# Altium PCB PCB_厨房烟雾检测_2022-05-04.pcbdoc
Units mm, origin at the board's own origin, x right, y up, seen from the top; angles counter-clockwise.
Board outline 134.75 x 92.33 mm, 2 copper layers (Top Layer, Bottom Layer); 46 components, 57 nets, 212 pads, 318 vias.
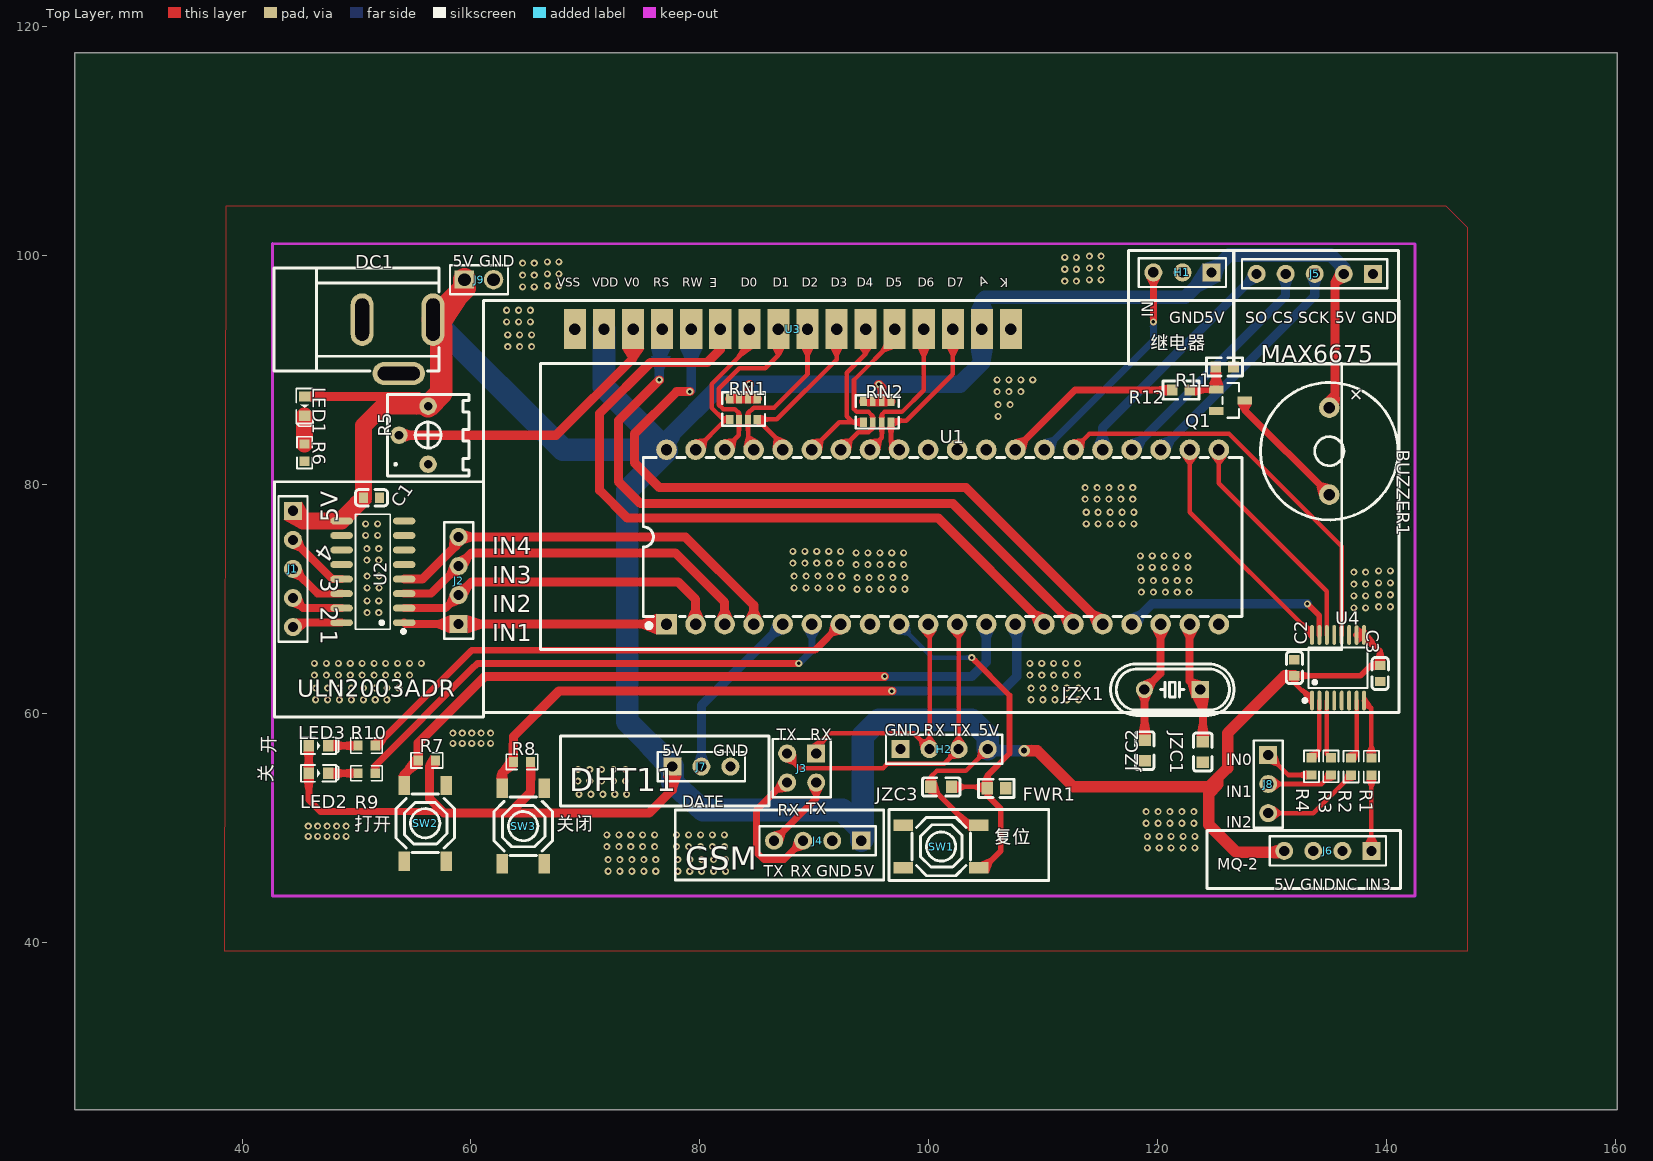
[diagram p0: Top Layer view]
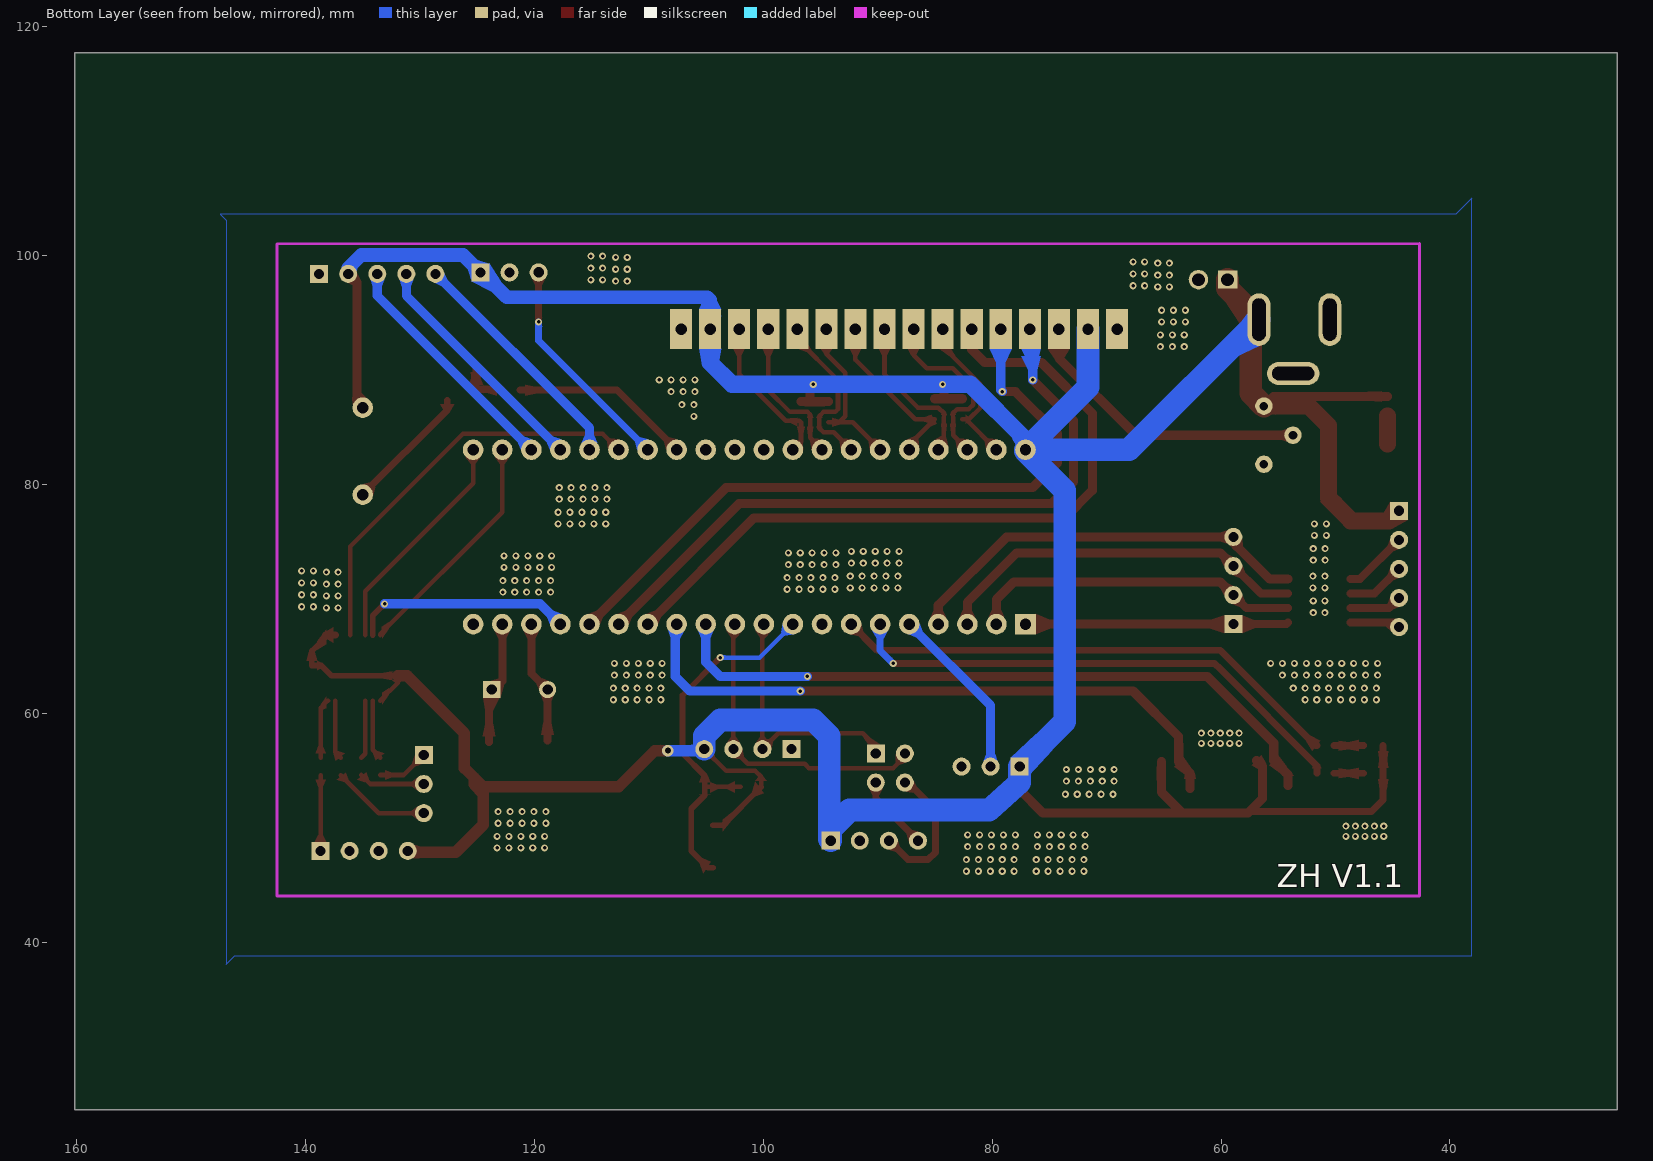
[diagram p1: Bottom Layer view, seen from below]

## Layer stack, top to bottom
Top Layer: signal copper (thickness not stored)
Dielectric: dielectric 0.32, FR-4, Dk 4.8
Bottom Layer: signal copper (thickness not stored)

## Board outline
160.147,25.4 25.4,25.4 25.4,117.729 160.147,117.729

## Components (designator, comment, footprint, x,y, rotation, side; value= is the part's Value field where it differs from the comment)
BUZZER1 "TMB12A05" BUZ-TH_BD12.0-P7.60-D0.6-FD 135.001,82.931 r270 top
C1 "100nF" C0603#1 51.308,78.867 r180 top
C2 "100nF" C0603#1 131.953,64.008 r270 top
C3 "100nF" C0603#1 139.446,63.5 r270 top
DC1 "DC-005-25A" DC-IN-TH_DC005 53.594,92.075 r0 top
FWR1 "10k" R0603#1 105.918,53.467 r180 top
H1 "HDR-F-2.54_1x3" HDR-F-2.54_1X3 122.174,98.552 r180 top
H2 "HDR-F-2.54_1x4" HDR-F-2.54_1X4 101.346,56.896 r0 top
J1 "HDR-M-2.54_1x5" HDR-M-2.54_1X5 44.45,72.644 r270 top
J2 "HDR-M-2.54_1x4" HDR-M-2.54_1X4 58.928,71.628 r90 top
J3 "HDR-M-2.54_2x2" HDR-M-2.54_2X2 88.9,55.245 r270 top
J4 "SIM" HDR-M-2.54_1X4 90.297,48.895 r180 top
J5 "HDR-M-2.54_1x5" HDR-M-2.54_1X5 133.731,98.425 r180 top
J6 "HDR-M-2.54_1x4" HDR-M-2.54_1X4 134.874,48.006 r180 top
J7 "HDR-M-2.54_1x3" HDR-M-2.54_1X3 80.137,55.372 r0 top
J8 "HDR-M-2.54_1x3" HDR-M-2.54_1X3 129.667,53.848 r270 top
J9 "HDR-M-2.54_1x2" HDR-M-2.54_1X2 60.706,97.917 r0 top
JZC1 "22pf" C0603#2 123.952,56.642 r90 top
JZC2 "22pf" C0603#2 118.872,56.769 r90 top
JZC3 "10UF" C0603#2 101.092,53.594 r180 top
JZX1 "11.0592MHz" HC-49US_L11.5-W4.5-P4.88 121.285,62.103 r180 top
LED1 "LED-0603_R" LED0603_RED 45.466,86.868 r270 top
LED2 "LED-0603_R" LED0603_RED 46.686,54.787 r0 top
LED3 "LED-0603_R" LED0603_RED 46.686,57.2 r0 top
Q1 "S8050" SOT23_JX 126.365,87.376 r180 top
R1 "100k" R0603#2 138.684,55.372 r270 top
R2 "100k" R0603#2 136.906,55.372 r270 top
R3 "100k" R0603#2 135.145,55.392 r270 top
R4 "100k" R0603#2 133.452,55.392 r270 top
R5 "10kΩ" RES-ADJ-TH_3362P 54.991,84.328 r90 top
R6 "10k" R0603#2 45.466,82.804 r90 top
R7 "10k" R0603#2 56.155,55.916 r180 top
R8 "10k" R0603#2 64.463,55.789 r180 top
R9 "10k" R0603#2 50.877,54.787 r180 top
R10 "10k" R0603#2 50.877,57.2 r180 top
R11 "10K/1%" 0603_R_JX 125.857,90.297 r180 top
R12 "1K/1%" 0603_R_JX 122.047,88.265 r180 top
RN1 "10kΩ" RES-ARRAY-SMD_0603-8P-L3.2-W1.6-BL 83.82,86.614 r0 top
RN2 "10kΩ" RES-ARRAY-SMD_0603-8P-L3.2-W1.6-BL 95.504,86.36 r0 top
SW1 "TS-1187A-B-B-B" SW-SMD_4P-L5.1-W5.1-P3.70-LS6.5-TL-2 101.092,48.387 r180 top
SW2 "TS-1187A-B-B-B" SW-SMD_4P-L5.1-W5.1-P3.70-LS6.5-TL-2 56.007,50.419 r90 top
SW3 "TS-1187A-B-B-B" SW-SMD_4P-L5.1-W5.1-P3.70-LS6.5-TL-2 64.569,50.165 r90 top
U1 "STC89C516RD+40I-PDIP40" DIP-40_L52.3-W13.9-P2.54-LS15.2-BL 101.219,75.438 r0 top
U2 "ULN2003ADR" SOIC-16_L9.9-W3.9-P1.27-LS6.0-BL 51.435,72.39 r90 top
U3 "LCD-1602" LCD-1602 99.568,75.819 r0 top
U4 "XPT2046" TSSOP-16_L5.0-W4.4-P0.65-LS6.4-BL 135.763,64.008 r0 top

## Footprints (in the part's own frame and the unit in brackets; to place one, negate y for a bottom-side part, rotate by r counter-clockwise, add the part's x,y. Pads: shape width x height; smd on the part's side, far side on the other; paste and mask are expansions set on the pad)
0603_R_JX [mm]
  rect 0.93x0.98 smd: 1(-0.77,-0.003) 2(0.772,-0.003)
  silkscreen extent -1.56,-0.8 1.57,0.8
BUZ-TH_BD12.0-P7.60-D0.6-FD [mm]
  round 1.8 hole 1: 1(-3.8,0) 2(3.8,0)
  silkscreen extent -6,-6 6,6
C0603#1 [mm]
  rect 0.8x0.9 smd: 1(-0.7,0) 2(0.7,0)
  silkscreen extent -1.41,-0.71 1.39,0.72
C0603#2 [mm]
  rect 1x1.1 smd: 1(-0.9,0) 2(0.9,0)
  silkscreen extent -1.65,-0.8 1.65,0.8
DC-IN-TH_DC005 [mm]
  oval 2x4.6 hole 1.2 slot 3.7 at 90 deg: 1(3.1,2.35) 2(-3.1,2.35)
  oval 4.6x2 hole 1.2 slot 3.7 at 0 deg: 3(0.1,-2.35)
  silkscreen extent -10.8,-2.15 3.6,6.85
DIP-40_L52.3-W13.9-P2.54-LS15.2-BL [mm]
  rect 1.8x1.8 hole 1: 1(-24.13,-7.62)
  round 1.8 hole 1: 2(-21.59,-7.62) 3(-19.05,-7.62) 4(-16.51,-7.62) 5(-13.97,-7.62) 6(-11.43,-7.62) 7(-8.89,-7.62) 8(-6.35,-7.62) 9(-3.81,-7.62) 10(-1.27,-7.62) 11(1.27,-7.62) 12(3.81,-7.62) 13(6.35,-7.62) 14(8.89,-7.62) 15(11.43,-7.62) 16(13.97,-7.62) 17(16.51,-7.62) 18(19.05,-7.62) 19(21.59,-7.62) 20(24.13,-7.62) 21(24.13,7.62) 22(21.59,7.62) 23(19.05,7.62) 24(16.51,7.62) 25(13.97,7.62) 26(11.43,7.62) 27(8.89,7.62) 28(6.35,7.62) 29(3.81,7.62) 30(1.27,7.62) 31(-1.27,7.62) 32(-3.81,7.62) 33(-6.35,7.62) 34(-8.89,7.62) 35(-11.43,7.62) 36(-13.97,7.62) 37(-16.51,7.62) 38(-19.05,7.62) 39(-21.59,7.62) 40(-24.13,7.62)
  silkscreen extent -26.16,-7.95 26.16,6.93
HC-49US_L11.5-W4.5-P4.88 [mm]
  rect 1.5x1.5 hole 0.9: 1(-2.44,0)
  round 1.5 hole 0.9: 2(2.44,0)
  silkscreen extent -5.39,-2.25 5.39,2.25
HDR-F-2.54_1X3 [mil]
  rect 62x62 hole 35: 1(-100,0)
  round 62 hole 35: 2(0,0)
  round 62 hole 36: 3(100,0)
  silkscreen extent -150,-49 150,50
HDR-F-2.54_1X4 [mil]
  rect 62x62 hole 35: 1(-150,0)
  round 62 hole 35: 2(-50,0) 3(50,0) 4(150,0)
  silkscreen extent -200,-50 200,50
HDR-M-2.54_1X2 [mm]
  rect 1.7x1.575 hole 1.1: 1(-1.27,0)
  round 1.7 hole 1.1: 2(1.27,0)
  silkscreen extent -2.54,-1.27 2.54,1.27
HDR-M-2.54_1X3 [mil]
  rect 62x62 hole 35: 1(-100,0)
  round 62 hole 35: 2(0,0) 3(100,0)
  silkscreen extent -150,-50 150,50
HDR-M-2.54_1X4 [mil]
  rect 62x62 hole 35: 1(-150,0)
  round 62 hole 35: 2(-50,0) 3(50,0) 4(150,0)
  silkscreen extent -200,-50 200,50
HDR-M-2.54_1X5 [mil]
  rect 62x62 hole 35: 1(-200,0)
  round 62 hole 35: 2(-100,0) 3(0,0) 4(100,0) 5(200,0)
  silkscreen extent -250,-50 250,50
HDR-M-2.54_2X2 [mil]
  rect 62x62 hole 35: 1(-50,50)
  round 62 hole 35: 2(50,50) 3(-50,-50) 4(50,-50)
  silkscreen extent -100,-100 100,100
LCD-1602 [mil]
  rect 76x136.8 hole 39.4: 1(-1200,700) 2(-1100,700) 3(-1000,700) 4(-900,700) 5(-800,700) 6(-700,700) 7(-600,700) 8(-500,700) 9(-400,700) 10(-300,700) 11(-200,700) 12(-100,700) 13(0,700) 14(100,700) 15(200,700) 16(300,700)
  silkscreen extent -1515,-619 1635,798
LED0603_RED [mm]
  rect 0.9x1 smd: 1(-0.85,0) 2(0.85,0)
  silkscreen extent -1.54,-0.73 1.75,0.73
R0603#1 [mm]
  rect 1x1.1 smd: 1(-0.8,0) 2(0.8,0)
  silkscreen extent -1.55,-0.8 1.55,0.81
R0603#2 [mm]
  rect 0.806x0.864 smd: 1(-0.753,0) 2(0.753,0)
  silkscreen extent -1.39,-0.66 1.39,0.66
RES-ADJ-TH_3362P [mil]
  round 60 hole 30: 1(-100,-50) 2(0,50) 3(100,-50)
  silkscreen extent -140,-190 140,90
RES-ARRAY-SMD_0603-8P-L3.2-W1.6-BL [mm]
  rect 0.65x0.8 smd: 1(-1.2,-0.9) 4(1.2,-0.9) 5(1.2,0.9) 8(-1.2,0.9)
  rect 0.5x0.8 smd: 2(-0.4,-0.9) 3(0.4,-0.9) 6(0.4,0.9) 7(-0.4,0.9)
  silkscreen extent -1.87,-1.45 1.87,1.47
SOIC-16_L9.9-W3.9-P1.27-LS6.0-BL [mm]
  oval 0.602x1.971 smd: 1(-4.445,-2.736) 2(-3.175,-2.736) 3(-1.905,-2.736) 4(-0.635,-2.736) 5(0.635,-2.736) 6(1.905,-2.736) 7(3.175,-2.736) 8(4.445,-2.736) 9(4.445,2.736) 10(3.175,2.736) 11(1.905,2.736) 12(0.635,2.736) 13(-0.635,2.736) 14(-1.905,2.736) 15(-3.175,2.736) 16(-4.445,2.736)
  silkscreen extent -5.36,-2.82 5.03,1.52
SOT23_JX [mm]
  rect 1.25x0.7 smd: 1(1.25,-0.95) 2(1.25,0.95) 3(-1.25,0)
  silkscreen extent -0.76,-1.52 0.69,1.52
SW-SMD_4P-L5.1-W5.1-P3.70-LS6.5-TL-2 [mm]
  rect 1.7x1 smd: 1(-3.3,1.849) 2(3.3,1.85) 3(-3.3,-1.85) 4(3.3,-1.85)
  silkscreen extent -2.55,-2.55 2.55,2.55
TSSOP-16_L5.0-W4.4-P0.65-LS6.4-BL [mm]
  oval 0.343x1.731 smd: 1(-2.275,-2.866) 2(-1.625,-2.866) 3(-0.975,-2.866) 4(-0.325,-2.866) 5(0.325,-2.866) 6(0.975,-2.866) 7(1.625,-2.866) 8(2.275,-2.866) 9(2.275,2.866) 10(1.625,2.866) 11(0.975,2.866) 12(0.325,2.866) 13(-0.325,2.866) 14(-0.975,2.866) 15(-1.625,2.866) 16(-2.275,2.866)
  silkscreen extent -3.05,-3.02 2.58,1.77

## Via types
v1: diameter 0.62, hole 0.305, Top Layer to Bottom Layer, tented both sides, 317 vias
v2: diameter 1, hole 0.5, Top Layer to Bottom Layer, tented both sides, 1 vias

## Nets (pads, with @x,y where several pads share a name; then routed paths per layer and width w, separated by ;. In a path a pad name is that pad's centre, name@x,y a point inside that pad or via, vN(x,y) a via of type N, cw(c..) or ccw(c..) an arc to the next point about the centre after c; other vN are vias at no path point)
1IN: J2.1 U1.1 U2.1 | length 23
  Top Layer w0.7: U2.1 54.298,67.818 J2.1
  Top Layer w0.8: J2.1 U1.1
2IN: J2.2 U1.2 U2.2 | length 29.2
  Top Layer w0.7: U2.2 57.785,69.215 J2.2
  Top Layer w0.8: J2.2 60.071,71.501 78.105,71.501 79.629,69.977 U1.2
3IN: J2.3 U1.3 U2.3 | length 33.2
  Top Layer w0.7: U2.3 56.515,70.485 J2.3
  Top Layer w0.8: J2.3 60.071,74.041 77.851,74.041 82.169,69.723 U1.3
4IN: J2.4 U1.4 U2.4 | length 36.5
  Top Layer w0.8: U2.4 55.753,71.755 58.928,74.93 J2.4 78.74,75.438 84.709,69.469 U1.4
+5.0V: BUZZER1.1 C1.2 C2.2 C3.1 DC1.1 H1.1 H2.4 J1.1 J4.1 J5.2 J6.4 J7.1 J9.1 JZC3.2 LED1.1 LED2.1 LED3.1 R5.3 R7.1 R8.1 RN1.5 RN1.6 RN1.7 RN1.8 RN2.5 RN2.6 RN2.7 RN2.8 SW1.3 U1.40 U2.9 U3.2 U3.15 U4.1 U4.9 U4.10 | length 370.4
  Top Layer w0.4: JZC3.2 100.193,54.473 100.711,54.991 103.251,54.991 H2.4 ; C2.2 131.953,62.677 U4.1
  Top Layer w0.5: JZC3.2 103.548,50.236 SW1.3 ; C2.2 137.739,63.307 138.631,64.201 C3.1 139.446,65.466 U4.9
  Top Layer w0.6: LED3.1 LED2.1 45.837,52.461 46.863,51.435 57.531,51.435 57.658,51.308 ; U4.10 138.239,66.873
  Top Layer w0.8: LED1.1 55.41,87.719 R5.3 ; R7.1 56.388,55.395 56.388,52.578 57.658,51.308 63.373,51.308 ; R8.1 65.217,53.152 63.373,51.308 ; J7.1 77.597,53.34 75.565,51.308 63.373,51.308 ; RN1.8 RN1.5 ; RN1.6 84.221,88.664 v1(84.328,88.773) ; RN2.8 RN2.5 ; v1(95.631,88.773) 95.905,88.501 RN2.6 ; BUZZER1.1 135.509,87.234 135.509,97.663 J5.2
  Top Layer w1: v2(108.331,56.769) 109.474,56.769 112.649,53.594 124.46,53.594 126.111,55.245 126.111,58.293 131.125,63.307 C2.2 ; 125.27,54.404 125.27,53.816 124.46,53.006 124.46,50.292 126.873,47.879 130.937,47.879 J6.4
  Top Layer w1.5: J1.1 45.339,76.835 U2.9 48.699,76.959 C1.2 50.607,85.151 52.324,86.868 R5.3
  Top Layer w2: R5.3 57.404,88.011 57.404,93.715 DC1.1 ; DC1.1 59.436,97.168 J9.1
  Bottom Layer w1: H2.4 105.283,56.769 v2(108.331,56.769)
  Bottom Layer w1.2: U3.15 104.648,96.139 104.902,96.393 122.428,96.393 124.587,98.552 H1.1 126.238,100.076 135.128,100.076 136.271,98.933 J5.2
  Bottom Layer w1.5: U1.40 77.089,83.947 81.915,88.773 v1(84.328,88.773) v1(95.631,88.773) 102.743,88.773 104.648,90.678 U3.15
  Bottom Layer w2: DC1.1 68.062,83.058 U1.40 ; U3.2 71.628,88.519 U1.40 ; H2.4 105.156,58.039 103.759,59.436 95.631,59.436 94.234,58.039 94.234,49.022 J4.1 94.107,49.911 92.456,51.562 80.264,51.562 77.597,53.975 J7.1 73.66,59.309 73.66,79.502 77.089,82.931 U1.40
AIN0: J8.1 R4.2 | length 4.5
  Top Layer w0.4: J8.1 131.417,54.638 R4.2
AIN1: J8.2 R3.2 | length 5.8
  Top Layer w0.4: J8.2 134.356,53.848 R3.2
AIN2: J8.3 R2.2 | length 8.6
  Top Layer w0.4: J8.3 133.596,51.308 R2.2
AIN3: J6.1 R1.2 | length 6.6
  Top Layer w0.4: J6.1 R1.2
BUZZER_CTR: R12.2 U1.28 | length 15.9
  Top Layer w0.6: U1.28 112.779,88.268 R12.2
CS: J5.4 U1.24 | length 20.9
  Bottom Layer w0.8: U1.24 131.191,96.52 J5.4
D0: RN1.1 U1.39 U3.7 | length 14.3
  Top Layer w0.4: U1.39 82.286,85.715 RN1.1 82.052,85.715 81.026,86.741 81.026,88.773 84.328,92.075 U3.7
D1: RN1.2 U1.38 U3.8 | length 15.9
  Top Layer w0.4: U1.38 83.419,84.31 RN1.2 83.439,86.233 83.058,86.614 82.042,86.614 81.661,86.995 81.661,88.392 83.439,90.17 85.725,90.17 86.868,91.313 U3.8
D2: RN1.3 U1.37 U3.9 | length 13.9
  Top Layer w0.4: U1.37 84.221,83.548 84.221,85.715 84.201,86.233 84.709,86.741 86.487,86.741 89.408,89.662 U3.9
D3: RN1.4 U1.36 U3.10 | length 15.3
  Top Layer w0.4: U1.36 87.249,83.485 RN1.4 86.731,85.715 91.948,90.932 U3.10
D4: RN2.1 U1.35 U3.11 | length 15.5
  Top Layer w0.4: U1.35 92.192,85.461 RN2.1 93.365,85.461 92.837,85.989 92.837,89.789 94.488,91.44 U3.11
D5: RN2.2 U1.34 U3.12 | length 15
  Top Layer w0.4: U1.34 93.853,84.582 94.742,84.582 95.103,84.945 RN2.2 95.103,85.997 94.742,86.36 93.726,86.36 93.472,86.614 93.472,89.154 97.028,92.71 U3.12
D6: RN2.3 U1.33 U3.13 | length 13.4
  Top Layer w0.4: U1.33 95.905,84.092 95.905,85.461 95.905,86.126 96.139,86.36 97.663,86.36 99.568,88.265 U3.13
D7: RN2.4 U1.32 U3.14 | length 13.8
  Top Layer w0.4: U1.32 96.703,83.764 RN2.4 96.843,85.598 98.044,85.598 102.108,89.662 U3.14
GND: C1.1 C2.1 C3.2 DC1.2 DC1.3 FWR1.1 H1.2 H2.1 J4.2 J5.1 J6.3 J7.3 J9.2 JZC1.1 JZC2.1 Q1.2 R5.1 R6.1 R11.1 SW2.4 SW3.4 U1.20 U2.8 U3.1 U3.16 U4.4 U4.5 U4.6
  other v1: 71.984,46.228 73.025,46.228 74.066,46.228 75.108,46.228 76.149,46.228 78.08,46.228 79.121,46.228 80.162,46.228 81.204,46.228 82.245,46.228 71.984,47.244 73.025,47.244 74.066,47.244 75.108,47.244 76.149,47.244 78.08,47.244 79.121,47.244 80.162,47.244 81.204,47.244 82.245,47.244 119.101,48.26 120.142,48.26 121.183,48.26 122.225,48.26 123.266,48.26 71.882,48.387 72.923,48.387 73.965,48.387 75.006,48.387 76.048,48.387 77.978,48.387 79.019,48.387 80.061,48.387 81.102,48.387 82.144,48.387 45.783,49.276 46.609,49.276 47.434,49.276 48.26,49.276 49.085,49.276 119.101,49.276 120.142,49.276 121.183,49.276 122.225,49.276 123.266,49.276 71.882,49.403 72.923,49.403 73.965,49.403 75.006,49.403 76.048,49.403 77.978,49.403 79.019,49.403 80.061,49.403 81.102,49.403 82.144,49.403 45.783,50.165 46.609,50.165 47.434,50.165 48.26,50.165 49.085,50.165 118.999,50.419 120.04,50.419 121.082,50.419 122.123,50.419 123.165,50.419 118.999,51.435 120.04,51.435 121.082,51.435 122.123,51.435 123.165,51.435 69.444,52.959 70.485,52.959 71.526,52.959 72.568,52.959 73.609,52.959 69.342,54.102 70.383,54.102 71.425,54.102 72.466,54.102 73.508,54.102 69.342,55.118 70.383,55.118 71.425,55.118 72.466,55.118 73.508,55.118 58.42,57.404 59.245,57.404 60.071,57.404 60.896,57.404 61.722,57.404 58.42,58.293 59.245,58.293 60.071,58.293 60.896,58.293 61.722,58.293 46.431,61.214 47.473,61.214 48.514,61.214 49.555,61.214 50.597,61.214 51.638,61.214 52.654,61.214 108.941,61.214 109.982,61.214 111.023,61.214 112.065,61.214 113.106,61.214 46.431,62.23 47.473,62.23 48.514,62.23 49.555,62.23 50.597,62.23 51.638,62.23 52.654,62.23 53.696,62.23 108.941,62.23 109.982,62.23 111.023,62.23 112.065,62.23 113.106,62.23 46.33,63.373 47.371,63.373 48.412,63.373 49.454,63.373 50.495,63.373 51.537,63.373 52.553,63.373 53.594,63.373 54.635,63.373 108.839,63.373 109.88,63.373 110.922,63.373 111.963,63.373 113.005,63.373 46.33,64.389 47.371,64.389 48.412,64.389 49.454,64.389 50.495,64.389 51.537,64.389 52.553,64.389 53.594,64.389 54.635,64.389 55.677,64.389 108.839,64.389 109.88,64.389 110.922,64.389 111.963,64.389 113.005,64.389 50.927,68.834 51.943,68.834 137.16,69.24 138.176,69.24 139.319,69.342 140.335,69.342 50.927,69.85 51.943,69.85 137.16,70.282 138.176,70.282 139.319,70.383 140.335,70.383 118.593,70.612 119.634,70.612 120.675,70.612 121.717,70.612 122.758,70.612 93.751,70.866 94.793,70.866 95.834,70.866 96.876,70.866 97.917,70.866 50.927,70.993 51.968,70.993 88.24,70.993 89.281,70.993 90.322,70.993 91.364,70.993 92.405,70.993 137.16,71.323 138.176,71.323 139.319,71.425 140.335,71.425 118.593,71.628 119.634,71.628 120.675,71.628 121.717,71.628 122.758,71.628 93.751,71.882 94.793,71.882 95.834,71.882 96.876,71.882 97.917,71.882 50.927,72.009 51.968,72.009 88.24,72.009 89.281,72.009 90.322,72.009 91.364,72.009 92.405,72.009 137.16,72.365 138.176,72.365 139.319,72.466 140.335,72.466 118.491,72.771 119.532,72.771 120.574,72.771 121.615,72.771 122.657,72.771 93.65,73.025 94.691,73.025 95.733,73.025 96.774,73.025 97.815,73.025 88.138,73.152 89.179,73.152 90.221,73.152 91.262,73.152 92.304,73.152 50.902,73.406 51.943,73.406 118.491,73.787 119.532,73.787 120.574,73.787 121.615,73.787 122.657,73.787 93.65,74.041 94.691,74.041 95.733,74.041 96.774,74.041 97.815,74.041 88.138,74.168 89.179,74.168 90.221,74.168 91.262,74.168 92.304,74.168 50.902,74.422 51.943,74.422 50.8,75.565 51.841,75.565 50.8,76.581 51.841,76.581 113.767,76.581 114.808,76.581 115.849,76.581 116.891,76.581 117.932,76.581 113.767,77.597 114.808,77.597 115.849,77.597 116.891,77.597 117.932,77.597 113.665,78.74 114.706,78.74 115.748,78.74 116.789,78.74 117.831,78.74 113.665,79.756 114.706,79.756 115.748,79.756 116.789,79.756 117.831,79.756 106.07,85.979 106.07,86.995 107.112,86.995 105.969,88.138 107.01,88.138 108.052,88.138 105.969,89.154 107.01,89.154 108.052,89.154 109.093,89.154 63.221,92.075 64.262,92.075 65.303,92.075 63.221,93.091 64.262,93.091 65.303,93.091 63.119,94.234 64.16,94.234 65.202,94.234 63.119,95.25 64.16,95.25 65.202,95.25 64.516,97.282 65.532,97.282 66.675,97.384 67.691,97.384 111.887,97.79 112.903,97.79 114.046,97.892 115.062,97.892 64.516,98.323 65.532,98.323 66.675,98.425 67.691,98.425 111.887,98.831 112.903,98.831 114.046,98.933 115.062,98.933 64.516,99.365 65.532,99.365 66.675,99.466 67.691,99.466 111.887,99.873 112.903,99.873 114.046,99.974 115.062,99.974
KEY1: R7.2 SW2.2 U1.12 | length 60.1
  Top Layer w0.8: SW2.2@54.155,53.718 54.155,54.671 R7.2 55.402,57.434 61.214,63.246 v1(96.139,63.246)
  Bottom Layer w0.8: v1(96.139,63.246) 103.759,63.246 105.029,64.516 U1.12
KEY2: R8.2 SW3.2 U1.13 | length 55.7
  Top Layer w0.8: SW3.2 62.718,54.798 R8.2 63.711,57.996 67.691,61.976 v1(96.774,61.976)
  Bottom Layer w0.8: v1(96.774,61.976) 106.426,61.976 107.696,63.246 107.696,67.691 U1.13
LED1: R9.1 U1.6 | length 45.3
  Top Layer w0.6: R9.1 51.631,55.441 60.071,63.881 60.579,64.389 v1(88.646,64.389)
  Bottom Layer w0.6: v1(88.646,64.389) 89.789,65.532 U1.6
LED1_2: LED1.2 R6.2 | length 2.5
  Top Layer w1.5: R6.2 LED1.2
LED2: R10.1 U1.7 | length 45.1
  Top Layer w0.6: R10.1 51.74,57.201 60.071,65.532 90.043,65.532 U1.7
LED3_2: LED3.2 R10.2 | length 2.6
  Top Layer w0.6: LED3.2 R10.2
MCU_RX: H2.2 J3.1 U1.10 | length 22.6
  Top Layer w0.4: J3.1 90.17,57.15 91.313,58.293 98.679,58.293 H2.2 100.076,67.691 U1.10
MCU_TX: H2.3 J3.3 U1.11 | length 27.3
  Top Layer w0.4: J3.3 87.63,56.261 88.646,55.245 96.012,55.245 96.393,55.626 101.346,55.626 H2.3 102.616,67.691 U1.11
P20/SDA: U1.21 U4.14 | length 20.1
  Top Layer w0.4: U1.21 125.349,80.137 134.788,70.698 U4.14
P21/SCL: U1.22 U4.16 | length 20.6
  Top Layer w0.4: U1.22 122.809,77.597 133.487,66.919 U4.16
P25/ADC: U1.26 U4.12 | length 35.8
  Top Layer w0.4: U1.26 114.046,84.455 126.238,84.455 136.088,74.605 U4.12
P34/LCDEN: U1.14 U3.6 | length 65.1
  Top Layer w0.8: U3.6 81.788,91.821 80.645,90.678 75.692,90.678 71.247,86.233 71.247,79.502 73.66,77.089 100.838,77.089 U1.14
P35/RS: U1.15 U3.4 | length 59.8
  Top Layer w0.8: v1(76.454,89.154) 72.898,85.598 72.898,80.264 74.803,78.359 102.108,78.359 U1.15
  Bottom Layer w0.8: v1(76.454,89.154) 76.454,93.345 U3.4
P36/WR: U1.16 U3.5 | length 61.1
  Top Layer w0.8: v1(79.121,88.138) 77.978,88.138 74.295,84.455 74.295,81.915 76.454,79.756 103.251,79.756 U1.16
  Bottom Layer w0.8: v1(79.121,88.138) 79.248,88.265 U3.5
P37/RD: U1.17 U4.15 | length 19.3
  Top Layer w0.5: v1(133.096,69.596) 134.137,68.555 U4.15
  Bottom Layer w0.8: U1.17 119.507,69.596 v1(133.096,69.596)
Q1_3: BUZZER1.2 Q1.3 | length 11.3
  Top Layer w0.6: Q1.3 127.615,86.517 BUZZER1.2
R9_2: LED2.2 R9.2 | length 2.6
  Top Layer w0.6: LED2.2 R9.2
R11_2: Q1.1 R11.2 R12.1 | length 4.3
  Top Layer w0.6: R12.1 122.875,88.326 Q1.1 125.115,90.272 R11.2
RELAY: H1.3 U1.27 | length 19.4
  Top Layer w0.6: v1(119.634,94.234) H1.3
  Bottom Layer w0.6: U1.27 119.634,92.583 v1(119.634,94.234)
RST: FWR1.2 JZC3.1 SW1.1 U1.9 | length 32.8
  Top Layer w0.4: JZC3.1 104.991,53.594 FWR1.2
  Top Layer w0.5: v1(103.759,64.897) 107.061,61.595 107.061,56.515 105.118,54.572 FWR1.2 105.118,52.87 106.299,51.689 106.299,48.006 104.831,46.538 SW1.1
  Bottom Layer w0.4: U1.9 100.33,64.897 v1(103.759,64.897)
S$164: 
SCK: J5.3 U1.23 | length 20.9
  Bottom Layer w0.8: U1.23 133.731,96.52 J5.3
SO: J5.5 U1.25 | length 20.9
  Bottom Layer w0.8: U1.25 115.189,84.963 J5.5
T-RX: J3.4 J4.3 | length 12.4
  Top Layer w0.6: J3.4 87.376,53.975 84.963,51.562 84.963,47.879 85.598,47.244 87.376,47.244 J4.3
T-TX: J3.2 J4.4 | length 6.6
  Top Layer w0.6: J4.4 90.17,52.578 J3.2
U2_13: J1.2 U2.13 | length 5.7
  Top Layer w0.7: J1.2 47.879,71.755 U2.13
U2_14: J1.3 U2.14 | length 5.1
  Top Layer w0.7: J1.3 46.609,70.485 U2.14
U2_15: J1.4 U2.15 | length 4.6
  Top Layer w0.7: J1.4 45.339,69.215 U2.15
U2_16: J1.5 U2.16 | length 4.4
  Top Layer w0.7: J1.5 44.831,67.945 U2.16
U4_2: R4.1 U4.2 | length 5.3
  Top Layer w0.4: R4.1@133.452,56.147 134.137,56.832 U4.2
U4_3: R3.1 U4.3 | length 5.1
  Top Layer w0.4: U4.3 134.788,56.505 R3.1@135.146,56.147
U4_7: R2.1 U4.7 | length 5.2
  Top Layer w0.4: R2.1 137.389,56.609 U4.7
U4_8: R1.1 U4.8 | length 5.3
  Top Layer w0.4: U4.8 138.684,60.495 R1.1
VO: R5.2 U3.3 | length 25.8
  Top Layer w0.8: R5.2 67.437,84.328 74.168,91.059 U3.3
WEN_DATE: J7.2 U1.5 | length 15.4
  Bottom Layer w0.8: J7.2 80.137,60.706 U1.5
XTAL1: JZC1.2 JZX1.1 U1.19 | length 10.8
  Top Layer w0.7: U1.19 122.809,62.865 123.571,62.103 JZX1.1 123.952,61.877 JZC1.2
XTAL2: JZC2.2 JZX1.2 U1.18 | length 10.8
  Top Layer w0.7: JZX1.2 118.872,62.075 JZC2.2 ; JZX1.2 120.269,63.527 U1.18
pads on no net: J6.2 SW1.2 SW1.4 SW2.1 SW2.3 SW3.1 SW3.3 U1.8 U1.29 U1.30 U1.31 U2.5 U2.6 U2.7 U2.10 U2.11 U2.12 U4.11 U4.13

## Polygon pours and split planes (outlines as drawn)
GND on Bottom Layer (solid): 38.1,105.029 39.497,103.632 147.447,103.632 146.939,103.124 146.939,38.1 146.177,38.862 38.1,38.862
GND on Top Layer (solid): 38.608,104.394 145.161,104.394 147.066,102.489 147.066,39.243 38.481,39.243

## Other copper
Top Layer:
  region net RELAY: 119.401,94.439 119.867,94.439 119.934,94.656 119.334,94.656
  region net RELAY: 120.225,98.031 119.043,98.031 119.334,97.48 119.934,97.48
  region net BUZZER_CTR: 107.513,83.956 108.467,83.002 108.648,83.712 108.223,84.137
  region net BUZZER_CTR: 120.81,87.778 120.81,88.758 119.91,88.568 119.91,87.968
  region net T-TX: 90.761,53.454 89.579,53.454 89.87,52.903 90.47,52.903
  region net T-TX: 86.438,49.681 87.273,48.846 87.457,49.441 87.033,49.865
  region net T-RX: 88.241,48.944 89.076,48.109 88.481,47.925 88.057,48.349
  region net T-RX: 87.547,53.192 86.864,54.155 86.58,53.603 86.932,53.107
  region net T-RX: 87.547,53.192 86.864,54.155 86.58,53.603 86.932,53.107
  region net +5.0V: 100.692,54.045 99.943,53.044 100.67,52.763 100.972,53.168
  region net +5.0V: 103.543,49.738 103.543,50.736 102.793,51.347 102.793,50.64
  region net RST: 104.601,47.038 105.242,46.038 105.567,46.921 105.291,47.351
  region net RST: 105.618,52.917 104.618,52.917 104.868,52.87 105.368,52.87
  region net +5.0V: 46.286,54.287 45.386,54.287 45.536,53.387 46.136,53.387
  region net LED2: 91.431,67.874 92.385,66.92 91.675,66.739 91.25,67.164
  region net LED2: 51.35,57.632 52.034,56.768 52.541,57.577 52.166,58.051
  region net LED1: 52.034,55.219 51.228,55.219 51.331,55.441 51.931,55.441
  region net LED3_2: 47.986,57.7 47.986,56.7 48.886,56.9 48.886,57.5
  region net LED3_2: 49.721,56.768 49.721,57.632 48.821,57.5 48.821,56.9
  region net R9_2: 47.986,55.287 47.986,54.287 48.886,54.487 48.886,55.087
  region net R9_2: 49.721,54.355 49.721,55.219 48.821,55.087 48.821,54.487
  region net +5.0V: 46.286,56.7 45.386,56.7 45.536,55.8 46.136,55.8
  region net +5.0V: 45.386,55.287 46.286,55.287 46.136,56.187 45.536,56.187
  region net KEY1: 54.998,56.348 55.805,56.348 55.801,57.433 55.001,57.433
  region net KEY2: 63.307,56.221 64.113,56.221 64.11,57.421 63.31,57.421
  region net RST: 104.618,54.017 105.618,54.017 105.368,54.572 104.868,54.572
  region net RST: 104.068,64.916 103.74,64.588 103.881,64.422 104.234,64.775
  region net +5.0V: 78.384,54.585 76.81,54.585 77.197,53.385 77.997,53.385
  region net +5.0V: 64.813,55.357 65.62,55.357 65.616,54.157 64.816,54.157
  region net +5.0V: 57.311,55.484 56.505,56.348 56.115,55.688 56.671,55.113
  region net KEY2: 64.113,55.357 63.307,56.221 62.588,55.232 63.134,54.647
  region net KEY2: 62.219,54.315 63.219,54.315 63.119,54.798 62.319,54.798
  region net KEY1: 55.805,55.484 54.998,56.348 54.279,55.359 54.825,54.774
  region net KEY1: 53.657,54.569 54.657,54.569 54.557,54.671 53.757,54.671
  region net +5.0V: 135.485,98.474 136.32,97.639 135.796,97.384 135.23,97.95
  region net +5.0V: 135.862,86.993 134.634,87.553 135.109,88.028 135.909,87.664
  region net Q1_3: 128.24,87.026 126.99,87.026 127.315,86.517 127.915,86.517
  region net Q1_3: 134.103,79.075 135.057,80.029 134.347,80.21 133.922,79.785
  region net R11_2: 123.282,88.758 123.282,87.778 124.182,88.026 124.182,88.626
  region net R11_2: 124.49,87.976 124.49,88.676 123.59,88.626 123.59,88.026
  region net R11_2: 125.55,89.809 124.62,89.809 124.815,88.909 125.415,88.909
  region net R11_2: 124.49,88.676 125.74,88.676 125.415,89.576 124.815,89.576
  region net +5.0V: 48.015,77.136 49.384,76.534 51.336,78.534 49.646,78.965
  region net +5.0V: 55.757,86.296 55.757,87.439 55.224,87.618 55.224,86.118
  region net AIN3: 139.116,54.216 138.252,54.216 138.484,53.616 138.884,53.616
  region net AIN3: 138.184,48.793 139.184,48.793 138.884,49.393 138.484,49.393
  region net +5.0V: 104.37,56.945 105.205,56.11 104.539,55.997 104.257,56.279
  region net +5.0V: 99.693,54.145 100.691,54.145 100.392,54.472 99.992,54.472
  region net RST: 104.617,53.094 104.617,54.018 104.017,53.794 104.017,53.394
  region net RST: 102.491,54.094 102.491,53.094 103.091,53.394 103.091,53.794
  region net D7: 97.029,85.86 97.029,85.098 97.629,85.398 97.629,85.798
  region net D5: 94.854,85.86 95.354,85.86 95.304,85.998 94.904,85.998
  region net D3: 85.344,86.114 85.344,85.313 85.944,85.514 85.944,85.914
  region net D2: 83.97,86.114 84.47,86.114 84.401,86.233 84.001,86.226
  region net D1: 83.17,86.114 83.67,86.114 83.639,86.225 83.239,86.233
  region net D0: 82.295,85.314 82.295,86.114 82.053,85.914 82.053,85.514
  region net P34/LCDEN: 109.211,67.762 110.165,68.716 109.525,68.967 108.96,68.402
  region net VO: 54.225,83.757 54.225,84.9 54.758,84.728 54.758,83.928
  region net XTAL1: 124.475,61.354 123.077,61.354 123.602,60.304 124.302,60.304
  region net XTAL1: 123.401,58.042 124.503,58.042 124.302,59.092 123.602,59.092
  region net D7: 102.608,91.862 101.608,91.862 101.908,91.262 102.308,91.262
  region net D7: 97.029,85.86 97.029,85.098 97.629,85.398 97.629,85.798
  region net D5: 96.986,91.862 96.063,92.245 95.758,91.722 96.157,91.556
  region net D5: 94.854,85.86 95.354,85.86 95.304,85.998 94.904,85.998
  region net D4: 94.988,91.862 93.988,91.862 94.288,91.44 94.688,91.44
  region net D3: 92.448,91.862 91.448,91.862 91.748,91.262 92.148,91.262
  region net D3: 85.344,86.114 85.344,85.313 85.944,85.514 85.944,85.914
  region net D2: 89.908,91.862 88.908,91.862 89.208,91.262 89.608,91.262
  region net D2: 83.97,86.114 84.47,86.114 84.401,86.233 84.001,86.226
  region net D1: 87.368,91.862 86.368,91.862 86.668,91.313 87.068,91.313
  region net D1: 83.17,86.114 83.67,86.114 83.639,86.225 83.239,86.233
  region net D0: 84.615,91.862 83.615,91.862 83.232,91.262 83.797,91.262
  region net D0: 82.295,85.314 82.295,86.114 82.053,85.914 82.053,85.514
  region net P34/LCDEN: 82.753,91.862 80.823,91.862 81.388,91.821 82.188,91.821
  region net P34/LCDEN: 109.211,67.762 110.165,68.716 109.525,68.967 108.96,68.402
  region net VO: 75.133,91.862 73.203,91.862 73.768,91.059 74.568,91.059
  region net VO: 54.225,83.757 54.225,84.9 54.758,84.728 54.758,83.928
  region net +5.0V: 45.237,78.511 43.663,76.937 44.809,76.305 45.869,77.365
  region net U2_13: 44.401,74.398 45.236,75.233 45.456,74.673 44.961,74.178
  region net U2_14: 44.401,71.858 45.236,72.693 45.456,72.133 44.961,71.638
  region net U2_15: 44.401,69.318 45.236,70.153 45.456,69.593 44.961,69.098
  region net U2_16: 45.147,67.197 44.727,68.301 45.319,68.295 45.585,67.595
  region net +5.0V: 94.629,87.66 94.629,86.86 95.829,86.86 95.829,87.66
  region net +5.0V: 96.379,86.86 96.379,87.66 95.179,87.66 95.179,86.86
  region net +5.0V: 82.945,87.914 82.945,87.114 84.145,87.114 84.145,87.914
  region net +5.0V: 84.695,87.114 84.695,87.914 83.495,87.914 83.495,87.114
  region net +5.0V: 45.966,88.168 45.966,87.268 47.166,87.318 47.166,88.118
  region net +5.0V: 55.5,86.82 56.309,87.629 55.81,87.884 55.245,87.319
  region net P35/RS: 111.751,67.762 112.705,68.716 112.065,68.967 111.5,68.402
  region net 4IN: 59.238,74.714 58.171,75.221 58.084,74.652 58.851,74.288
  region net 3IN: 58.142,72.947 58.977,72.112 58.417,71.892 57.922,72.387
  region net 2IN: 58.142,70.407 58.977,69.572 58.417,69.352 57.922,69.847
  region net 1IN: 58.141,67.031 58.141,68.605 57.091,68.168 57.091,67.468
  region net 1IN: 59.715,68.605 59.715,67.031 60.915,67.418 60.915,68.218
  region net 1IN: 76.189,66.918 76.189,68.718 74.989,68.218 74.989,67.418
  region net 4IN: 85.384,68.413 84.034,68.413 84.309,69.043 85.109,69.043
  region net 4IN: 59.449,74.847 59.449,76.029 60,75.838 60,75.038
  region net 3IN: 82.844,68.413 81.494,68.413 81.769,69.043 82.569,69.043
  region net 3IN: 58.879,73.684 59.714,72.849 59.969,73.373 59.403,73.939
  region net 2IN: 80.304,68.413 78.954,68.413 79.229,69.043 80.029,69.043
  region net 2IN: 58.879,71.144 59.714,70.309 59.969,70.833 59.403,71.399
  region net D4: 93.979,85.06 93.979,85.86 93.379,85.661 93.379,85.261
  region net D7: 96.511,83.002 97.465,83.956 96.845,83.904 96.563,83.622
  region net D7: 97.029,85.06 96.379,85.06 96.504,84.46 96.904,84.46
  region net D6: 94.813,83.956 95.767,83.002 95.877,83.783 95.594,84.066
  region net D6: 96.154,85.06 95.654,85.06 95.704,84.46 96.104,84.46
  region net D5: 95.354,85.06 94.854,85.06 94.904,84.944 95.304,84.944
  region net D5: 92.273,83.956 93.227,83.002 93.337,83.783 93.054,84.066
  region net D4: 89.733,83.956 90.687,83.002 90.797,83.783 90.514,84.066
  region net D4: 93.979,85.06 93.979,85.86 93.379,85.66 93.379,85.26
  region net D0: 79.573,83.956 80.527,83.002 80.637,83.783 80.354,84.066
  region net D0: 82.295,85.314 82.295,86.114 82.285,85.914 82.285,85.514
  region net D1: 82.113,83.956 83.067,83.002 83.177,83.783 82.894,84.066
  region net D1: 83.67,85.314 83.17,85.314 83.22,84.714 83.62,84.714
  region net D2: 85.09,83.873 83.853,83.335 84.02,84.094 84.42,84.269
  region net D2: 84.47,85.313 83.97,85.313 84.02,84.713 84.42,84.713
  region net D3: 87.525,83.915 86.365,83.225 86.445,84.006 86.8,84.217
  region net D3: 85.344,86.114 84.845,85.313 85.393,85.058 85.61,85.406
  region net MCU_TX: 88.413,56.432 87.45,55.749 88.085,55.523 88.416,55.758
  region net MCU_TX: 101.83,56.945 102.665,56.11 101.999,55.997 101.717,56.279
  region net MCU_RX: 89.822,57.302 90.822,57.302 91.205,57.902 90.64,57.902
  region net MCU_RX: 99.29,56.847 100.125,57.682 99.459,57.795 99.177,57.513
  region net MCU_TX: 101.879,67.156 103.222,67.296 102.816,66.62 102.416,66.578
  region net MCU_TX: 103.207,57.417 102.025,57.417 102.416,57.968 102.816,57.968
  region net MCU_RX: 99.339,67.156 100.682,67.296 100.276,66.62 99.876,66.578
  region net MCU_RX: 100.667,57.417 99.485,57.417 99.876,57.968 100.276,57.968
  region net AIN0: 130.454,56.308 129.747,55.601 130.384,55.388 130.667,55.671
  region net AIN0: 133.02,54.236 133.02,55.042 132.42,54.839 132.42,54.439
  region net AIN1: 135.489,54.236 134.714,54.867 134.495,54.271 134.807,54.017
  region net AIN1: 130.188,53.257 130.188,54.439 130.739,54.048 130.739,53.648
  region net AIN2: 137.253,54.216 136.473,54.842 136.253,54.249 136.567,53.997
  region net AIN2: 130.188,50.717 130.188,51.899 130.739,51.508 130.739,51.108
  region net XTAL2: 118.296,61.592 119.42,61.622 119.222,61.092 118.522,61.073
  region net XTAL2: 118.321,58.169 119.423,58.169 119.222,59.219 118.522,59.219
  region net XTAL2: 120.944,67.223 119.594,67.223 119.919,66.593 120.619,66.593
  region net XTAL2: 118.798,62.852 119.594,62.056 119.815,62.578 119.32,63.072
  region net XTAL1: 123.484,67.223 122.134,67.223 122.459,66.593 123.159,66.593
  region net XTAL1: 122.974,61.354 123.793,62.852 123.056,63.112 122.634,62.545
  region net P36/WR: 114.291,67.762 115.245,68.716 114.605,68.967 114.04,68.402
  region net D6: 95.654,85.86 96.154,85.86 96.105,86.126 95.705,86.126
  region net D6: 100.068,91.862 99.068,91.862 99.368,91.262 99.768,91.262
  region net +5.0V: 57.694,95.725 57.694,93.125 59.498,95.816 58.729,97.875
  region net U4_2: 133.105,56.549 133.884,55.922 134.103,56.516 133.79,56.768
  region net U4_7: 136.56,56.528 137.338,55.9 137.53,56.467 137.232,56.735
  region net U4_8: 138.21,61.471 138.21,60.471 138.543,60.355 138.684,60.779
  region net U4_8: 139.116,56.528 138.252,56.528 138.484,57.128 138.884,57.128
  region net P21/SCL: 123.484,82.463 122.134,82.463 122.609,81.833 123.009,81.833
  region net P21/SCL: 133.316,66.59 133.318,67.59 132.716,67.972 132.716,67.407
  region net P37/RD: 133.405,69.615 133.077,69.287 133.218,69.121 133.571,69.474
  region net P20/SDA: 126.024,82.463 124.674,82.463 125.149,81.833 125.549,81.833
  region net P25/ADC: 112.593,83.956 113.547,83.002 113.657,83.783 113.374,84.066
  region net +5.0V: 137.56,67.568 137.56,66.179 138.239,66.574 138.239,67.174
  region net +5.0V: 130.617,47.358 130.477,48.531 129.94,48.379 130.059,47.379
  region net +5.0V: 108.662,56.394 108.662,57.144 109.012,57.269 109.012,56.269
  region net +5.0V: 132.403,62.908 131.503,62.908 131.753,62.677 132.153,62.677
  region net +5.0V: 133.316,60.814 133.316,61.814 132.716,62.196 132.716,61.631
  region net +5.0V: 138.996,63.8 138.996,64.6 138.63,64.45 138.63,63.95
  region net +5.0V: 132.403,63.708 132.403,62.908 133.153,63.058 133.153,63.558
  region net +5.0V: 138.21,67.327 138.176,66.078 138.96,65.599 138.96,66.306
  region net +5.0V: 138.996,64.6 139.896,64.6 139.696,65.35 139.196,65.35
Bottom Layer:
  region net RELAY: 119.401,94.029 119.867,94.029 119.934,93.812 119.334,93.812
  region net RELAY: 110.053,83.956 111.007,83.002 111.188,83.712 110.763,84.137
  region net LED1: 90.464,67.223 89.114,67.223 89.489,66.593 90.089,66.593
  region net LED1: 88.955,64.37 88.627,64.698 88.732,64.9 89.157,64.475
  region net KEY1: 105.704,67.223 104.354,67.223 104.629,66.593 105.429,66.593
  region net KEY2: 106.959,67.156 108.302,67.296 108.096,66.641 107.296,66.558
  region net RST: 103.554,64.664 103.554,65.13 103.337,65.097 103.337,64.697
  region net RST: 97.353,66.92 98.307,67.874 98.417,67.093 98.134,66.81
  region net WEN_DATE: 80.728,55.893 79.546,55.893 79.737,56.444 80.537,56.444
  region net WEN_DATE: 86.351,67.874 87.305,66.92 86.665,66.669 86.1,67.234
  region net +5.0V: 103.683,95.336 105.613,95.336 105.248,96.139 104.048,96.139
  region net +5.0V: 125.501,97.765 123.927,99.339 122.953,97.767 123.802,96.918
  region net P35/RS: 77.454,91.862 75.743,91.862 76.054,90.662 76.854,90.662
  region net +5.0V: 103.683,94.701 105.613,94.701 105.248,96.139 104.048,96.139
  region net +5.0V: 125.501,97.765 123.927,99.339 122.953,97.767 123.802,96.918
  region net P35/RS: 77.454,91.227 75.743,91.227 76.054,90.027 76.854,90.027
  region net +5.0V: 105.743,57.421 105.603,56.248 106.161,56.269 106.28,57.269
  region net +5.0V: 76.81,54.585 78.384,56.159 76.183,58.2 74.769,56.786
  region net +5.0V: 57.694,94.925 56.607,92.129 59.494,90.776 59.494,92.473
  region net +5.0V: 76.494,82.383 76.494,83.733 75.864,83.658 75.864,82.458
  region net +5.0V: 136.581,99.149 135.514,98.642 135.427,99.211 136.194,99.575
  region net +5.0V: 124.087,99.339 125.501,97.925 125.926,99.198 125.36,99.764
  region net SCK: 120.213,83.956 121.167,83.002 121.418,83.642 120.853,84.207
  region net SCK: 134.322,97.904 133.14,97.904 133.331,97.353 134.131,97.353
  region net CS: 117.673,83.956 118.627,83.002 118.878,83.642 118.313,84.207
  region net CS: 131.782,97.904 130.6,97.904 130.791,97.353 131.591,97.353
  region net SO: 115.864,83.653 114.514,83.653 114.789,84.283 115.589,84.283
  region net SO: 127.865,98.474 128.7,97.639 128.176,97.384 127.61,97.95
  region net +5.0V: 105.613,91.862 103.683,91.862 103.898,90.678 105.398,90.678
  region net P36/WR: 80.213,91.862 78.283,91.862 78.848,90.662 79.648,90.662
  region net +5.0V: 77.889,83.47 76.58,83.8 76.541,84.46 78.236,84.033
  region net P37/RD: 117.673,68.716 118.627,67.762 118.878,68.402 118.313,68.967

## Silkscreen, mask and mechanical layers (free items; w line width, h text height)
Top Overlay:
  lines w0.254: 42.831,59.69 61.087,59.69 61.087,80.264 42.831,80.264 42.831,59.69 ; 67.818,51.943 86.042,51.943 86.042,58.039 67.818,58.039 67.818,51.943 ; 77.851,45.466 96.075,45.466 96.075,51.562 77.851,51.562 77.851,45.466 ; 96.52,45.402 110.49,45.402 110.49,51.625 96.52,51.625 96.52,45.402 ; 117.475,90.551 126.619,90.551 126.619,100.457 117.475,100.457 117.475,90.551 ; 124.333,44.704 141.224,44.704 141.224,49.784 124.333,49.784 124.333,44.704 ; 126.682,90.551 141.034,90.551 141.034,100.457 126.682,100.457 126.682,90.551
  text "5V" at 58.42,99.068 h1
  text "GND" at 60.706,99.068 h1
  text "IN" at 119.626,94.615 h1 r90
  text "GND" at 121.031,94.115 h1
  text "5V" at 124.079,94.115 h1
  text "SO" at 127.677,94.115 h1
  text "CS" at 130.006,94.115 h1
  text "SCK" at 132.289,94.115 h1
  text "5V" at 135.509,94.115 h1
  text "GND" at 137.837,94.115 h1
  text "继电器" at 119.38,91.44 h2
  text "MAX6675" at 129.032,90.69 h1.5
  text "5V" at 48.375,76.708 h1.5 r90
  text "4" at 47.011,74.979 h1.5 r235
  text "IN4" at 61.85,73.925 h1.5
  text "3" at 46.875,71.882 h1.5 r270
  text "IN3" at 61.849,71.386 h1.5
  text "2" at 46.875,69.342 h1.5 r270
  text "IN2" at 61.849,68.846 h1.5
  text "1" at 46.875,67.31 h1.5 r270
  text "IN1" at 61.849,66.306 h1.5
  text "ULN2003ADR" at 44.831,61.48 h1.5
  text "GND" at 96.139,58.047 h1
  text "RX" at 99.546,58.047 h1
  text "TX" at 101.97,58.047 h1
  text "5V" at 104.394,58.047 h1
  text "TX" at 86.741,57.666 h1
  text "RX" at 89.662,57.666 h1
  text "开" at 43.307,56.515 h2 r90
  text "5V" at 76.708,56.269 h1
  text "GND" at 81.153,56.269 h1
  text "IN0" at 125.984,55.507 h1
  text "关" at 43.053,53.975 h2 r90
  text "DHT11" at 68.58,53.229 h2
  text "IN1" at 125.984,52.713 h1
  text "DATE" at 78.486,51.824 h1
  text "TX" at 89.281,51.189 h1
  text "RX" at 86.827,51.062 h1
  text "IN2" at 125.984,50.046 h1
  text "打开" at 49.784,49.403 h2 r359
  text "关闭" at 67.437,49.403 h2
  text "复位" at 105.664,48.26 h2
  text "GSM" at 78.74,46.371 h2
  text "MQ-2" at 125.222,46.363 h1
  text "TX" at 85.598,45.728 h1
  text "RX" at 87.895,45.728 h1
  text "GND" at 90.192,45.728 h1
  text "5V" at 93.472,45.728 h1
  text "5V" at 130.175,44.585 h1
  text "GND" at 132.461,44.585 h1
  text "NC" at 135.509,44.585 h1
  text "IN3" at 138.134,44.585 h1
Bottom Overlay:
  text "ZH V1.1" at 55.118,44.847 h2

## Text inside footprints (layer, text, board x,y; h text height)
BUZZER1: Top Overlay "+" at 137.215,86.927 h1.27 r45
U3: Top Overlay "VSS" at 67.564,97.282 h0.76; Top Overlay "VDD" at 70.612,97.282 h0.76; Top Overlay "V0" at 73.406,97.282 h0.76; Top Overlay "RS" at 75.946,97.282 h0.76; Top Overlay "RW" at 78.486,97.282 h0.76; Top Overlay "E" at 81.534,98.044 h0.76 r180; Top Overlay "D0" at 83.566,97.282 h0.76; Top Overlay "D7" at 101.6,97.282 h0.76; Top Overlay "A" at 104.531,97.307 h0.76 r21; Top Overlay "K" at 106.934,98.044 h0.76 r180; Top Overlay "D1" at 86.36,97.282 h0.76; Top Overlay "D2" at 88.9,97.282 h0.76; Top Overlay "D3" at 91.44,97.282 h0.76; Top Overlay "D4" at 93.726,97.282 h0.76; Top Overlay "D5" at 96.266,97.282 h0.76; Top Overlay "D6" at 99.06,97.282 h0.76